# Altium PCB HV_DCDC_V2.PcbDoc (part 1 of 2)
Units mil, origin at the board's own origin, x right, y up, seen from the top; angles counter-clockwise.
Board outline 7131.02 x 4169.41 mil, 2 copper layers (Top Layer, Bottom Layer); 124 components, 83 nets, 337 pads, 14 vias.
Unrouted connection lines stored in the file: 231.
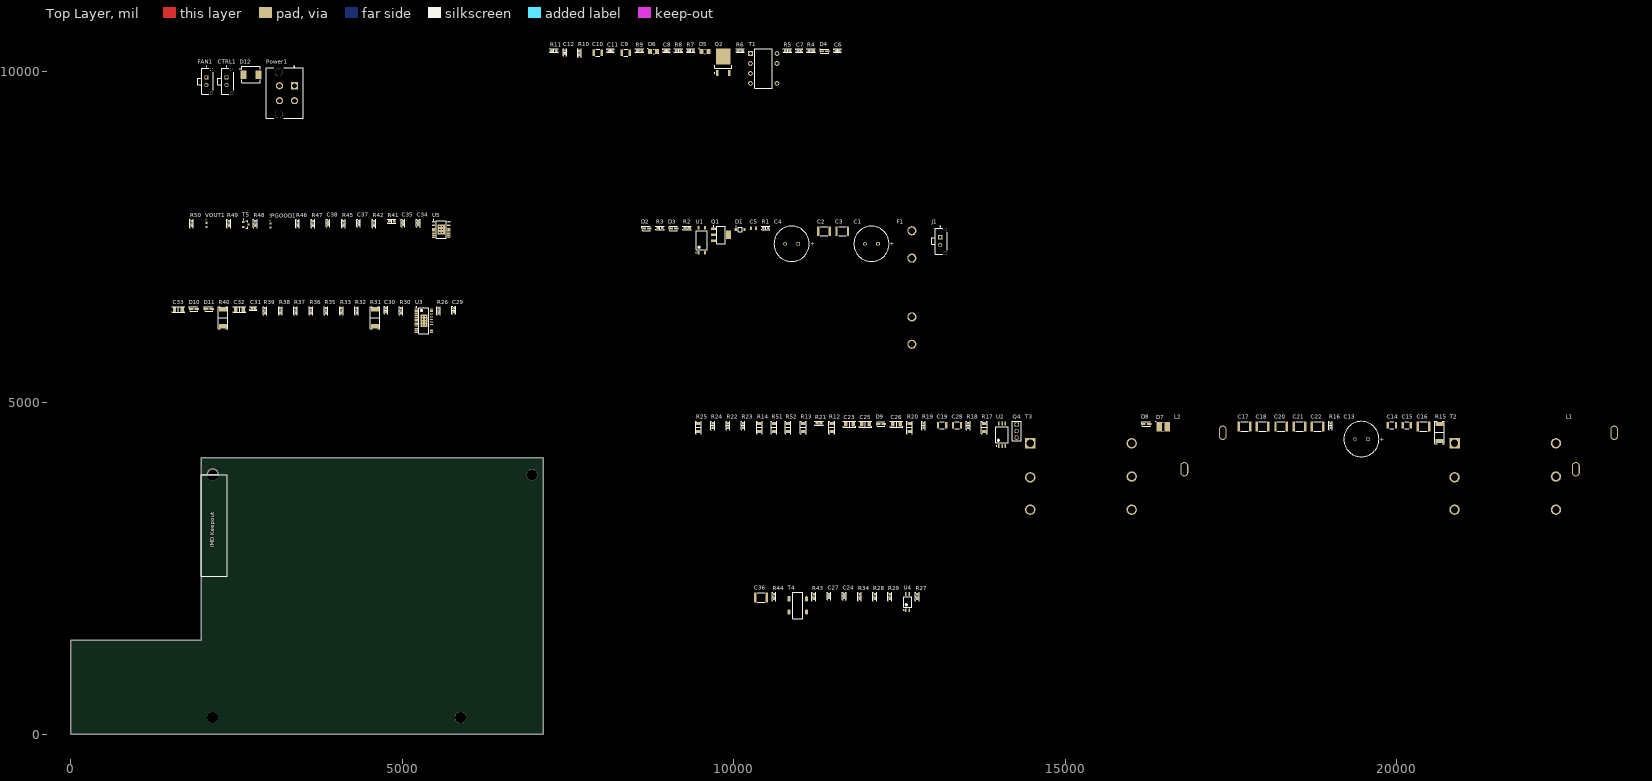
[diagram p0: Top Layer view]
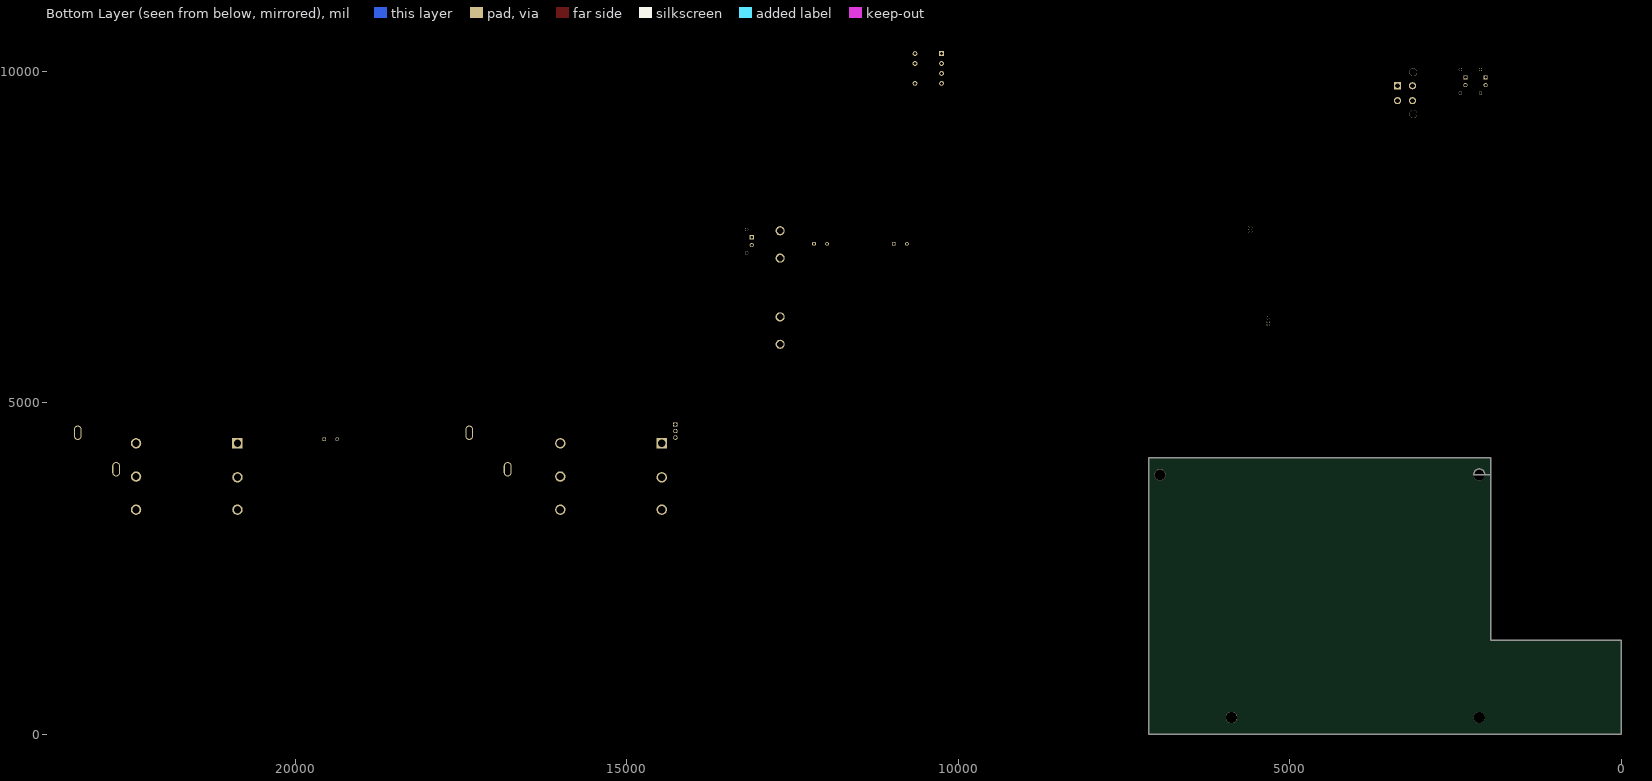
[diagram p1: Bottom Layer view, seen from below]

## Layer stack, top to bottom
Top Solder: solder mask 0.4, Solder Resist, Dk 3.5
Top Layer: signal copper 1.4
Dielectric 1: dielectric 12.6, FR-4, Dk 4.8
Bottom Layer: signal copper 1.4
Bottom Solder: solder mask 0.4, Solder Resist, Dk 3.5

## Board outline
0,0 7131.02,0 7131.02,4169.41 1968.5,4169.41 1968.5,3913.5 2060.13,3913.5 2061.71,3931.33 2067,3948.42 2075.76,3964.02 2087.61,3977.43 2102.01,3988.05 2118.32,3995.41 2135.82,3999.17 2153.71,3999.17 2171.21,3995.41 2187.52,3988.05 2201.92,3977.43 2213.77,3964.02 2222.53,3948.42 2227.82,3931.33 2227.82,3913.5 1968.5,3913.5 1968.5,1413.5 0,1413.5

## Design rules (kind name [scope] priority, off if disabled: settings)
Clearance [All] p1: gap=10 ignorepadtopadclearanceinfootprint=FALSE except(0: Arc-Hole Track-Hole SMDPad-Hole THPad-Hole Via-Hole Fill-Hole Poly-Hole Region-Hole Text-Hole)
PolygonConnect [All] p1: connectstyle=Relief reliefconductorwidth=10 reliefentries=4 polygonreliefangle="90 Angle" airgapwidth=10
RoomDefinition In [InComponentClass('In')] p1: confinementstyle=ConfineIn formatcopy=TRUE lockcomponents=FALSE outline 8590.24,5800 13240.24,5800 13240.24,7775 8590.24,7775
RoomDefinition V_AUX [InComponentClass('V_AUX')] p2: confinementstyle=ConfineIn formatcopy=TRUE lockcomponents=FALSE outline 7215,9730 11640,9730 11640,10450 7215,10450
RoomDefinition Trafo [InComponentClass('Trafo')] p3: confinementstyle=ConfineIn formatcopy=TRUE lockcomponents=FALSE outline 9415,3030 23455,3030 23455,4830 9415,4830
RoomDefinition Sek_CTRL [InComponentClass('Sek_CTRL')] p4: confinementstyle=ConfineIn formatcopy=TRUE lockcomponents=FALSE outline 1785,7471.57 5740,7471.57 5740,7876.57 1785,7876.57
RoomDefinition Prim_CTRL [InComponentClass('Prim_CTRL')] p5: confinementstyle=ConfineIn formatcopy=TRUE lockcomponents=FALSE outline 1520,6030.43 5935,6030.43 5935,6560.43 1520,6560.43
RoomDefinition Out [InComponentClass('Out')] p6: confinementstyle=ConfineIn formatcopy=TRUE lockcomponents=FALSE outline 1900.43,9272.17 3525.43,9272.17 3525.43,10187.17 1900.43,10187.17
RoomDefinition Interface_CTRL [InComponentClass('Interface_CTRL')] p7: confinementstyle=ConfineIn formatcopy=TRUE lockcomponents=FALSE outline 10295,1730.43 12925,1730.43 12925,2250.43 10295,2250.43
RoutingVias [All] p1: holewidth=28 width=50 viastyle="Through Hole" minholewidth=28 minwidth=50 maxholewidth=28 maxwidth=50
SolderMaskExpansion [All] p1: expansion=4 istentingtop=FALSE
Width [All] p1: maxlimit=10 minlimit=10 preferedwidth=10
30 further rules are at their usual default settings.

## Classes and differential pairs
component class V_AUX: C6 C7 C8 C9 C10 C11 C12 D4 D5 D6 Q2 R4 R5 R6 R7 R8 R9 R10 R11 T1
component class Trafo: C13 C14 C15 C16 C17 C18 C19 C20 C21 C22 C23 C25 C26 C28 D7 D8 D9 L1 L2 Q4 R12 R13 R14 R15 R16 R17 R18 R19 R20 R21 R22 R23 R24 R25 R51 R52 T2 T3 U2
component class Sek_CTRL: !PGOOD1 C34 C35 C37 C38 R41 R42 R45 R46 R47 R48 R49 R50 T5 U5 VOUT1
component class Prim_CTRL: C29 C30 C31 C32 C33 D10 D11 R26 R30 R31 R32 R33 R35 R36 R37 R38 R39 R40 U3
component class Out: CTRL1 D12 FAN1 Power1
component class In: C1 C2 C3 C4 C5 D1 D2 D3 F1 J1 Q1 R1 R2 R3 U1
component class Interface_CTRL: C24 C27 C36 R27 R28 R29 R34 R43 R44 T4 U4

## Components (designator, comment, footprint, x,y, rotation, side; value= is the part's Value field where it differs from the comment)
!PGOOD1 "Red, 2V" WL-SMCW_0603_H=0.7mm 3015,7671.57 r90 top
C1 "6.8uF" WCAP-AT1H_D13H20 12080.24,7395 r0 top
C2 "" WCAP-CSMH_1812_H2 11365.24,7585 r0 top
C3 "" WCAP-CSMH_1812_H2 11640.24,7585 r0 top
C4 "6.8uF" WCAP-AT1H_D13H20 10875.24,7395 r0 top
C5 "" WCAP-CSMH_0805_H1.25 10300.24,7630 r0 top
C6 "SMD Capacitor" "CAP 0603/1608" 11570,10310 r0 top value="OPT, 800V"
C7 "SMD Capacitor" "CAP 0603/1608" 10990,10310 r0 top value="150p, Opt"
C8 "SMD Capacitor" "CAP 0603/1608" 8990,10310 r0 top value=4.7uF
C9 "22nF, 1000V" WCAP-CSMH_1210_H1.6 8375,10280 r0 top
C10 "22nF, 1000V" WCAP-CSMH_1210_H1.6 7950,10280 r0 top
C11 "SMD Capacitor" "CAP 0603/1608" 8145,10310 r0 top value=22uF
C12 "SMD Capacitor" "CAP 0603/1608" 7455,10285 r90 top value=OPT
C13 "" WCAP-ATG8_D13H25 19470,4450 r0 top
C14 "" WCAP-CSGP_1210_H=2.5mm 19930,4660 r0 top
C15 "" WCAP-CSGP_1210_H=2.5mm 20155,4660 r0 top
C16 "4.7nF, 2000V" WCAP-CSMH_1812_H2 20405,4640 r0 top
C17 "4.7nF, 2000V" WCAP-CSMH_1812_H2 17705,4640 r0 top
C18 "4.7nF, 2000V" WCAP-CSMH_1812_H2 17980,4640 r0 top
C19 "" WCAP-CSGP_1210_H=2.5mm 13145,4660 r0 top
C20 "4.7nF, 2000V" WCAP-CSMH_1812_H2 18260,4640 r0 top
C21 "4.7nF, 2000V" WCAP-CSMH_1812_H2 18535,4640 r0 top
C22 "4.7nF, 2000V" WCAP-CSMH_1812_H2 18810,4640 r0 top
C23 "SMD Capacitor" "CAP 1206/3216" 11750,4675 r0 top value=220nF
C24 "SMD Capacitor" "CAP 0603/1608" 11670,2085.43 r90 top value=1uF
C25 "SMD Capacitor" "CAP 1206/3216" 11990,4675 r0 top value=OPT
C26 "SMD Capacitor" "CAP 1206/3216" 12460,4675 r0 top value=470pF
C27 "SMD Capacitor" "CAP 0603/1608" 11440,2085.43 r90 top value=220p
C28 "" WCAP-CSGP_1210_H=2.5mm 13370,4660 r0 top
C29 "SMD Capacitor" "CAP 0603/1608" 5780,6395.43 r90 top value=3.3nF
C30 "SMD Capacitor" "CAP 0603/1608" 4755,6395.43 r90 top value=470nF
C31 "SMD Capacitor" "CAP 0603/1608" 2755,6420.43 r0 top value=220nF
C32 "SMD Capacitor" "CAP 1206/3216" 2550,6405.43 r0 top value=4.7uF
C33 "SMD Capacitor" "CAP 1206/3216" 1625,6405.43 r0 top value=10uF
C34 "SMD Capacitor" "CAP 0603/1608" 5245,7711.57 r90 top value=4.7uF
C35 "SMD Capacitor" "CAP 0603/1608" 5015,7711.57 r90 top value=1uF
C36 "2.2nF, 3000V" WCAP-CSMH_1812_H2.5 10415,2060.43 r0 top
C37 "SMD Capacitor" "CAP 0603/1608" 4345,7711.57 r90 top value=22nF
C38 "SMD Capacitor" "CAP 0603/1608" 3885,7711.57 r90 top value=68pF
CTRL1 "43650-0229" FP-43650-0229-MFG 2340.43,9847.17 r90 top
D1 "MMSZ4707T1G" ONSC-SOD-123-2-425-04_V 10100.24,7610 r0 top
D2 "BAT46WH" DIOM2715X18N 8685.24,7625 r0 top
D3 "BAT46WH" DIOM2715X18N 9095.24,7625 r0 top
D4 "OPT" DIOM2715X18N 11375,10300 r0 top
D5 "SS10200HE_R1_00001" Chip2PinSM127P600-8N 9570,10295 r0 top
D6 "SS10200HE_R1_00001" Chip2PinSM127P600-8N 8795,10295 r0 top
D7 "CMR1U-10TR13" "DIOC4536X24L CMR1U-10" 16480,4635 r0 top
D8 "OPT" DIOM2715X18N 16225,4680 r0 top
D9 "OPT" DIOM2715X18N 12225,4680 r0 top
D10 "BAT46WH" DIOM2715X18N 1860,6410.43 r0 top
D11 "BAT46WH" DIOM2715X18N 2085,6410.43 r0 top
D12 "SMC30J24A" "JEDEC DO-214AB" 2720.43,9947.17 r0 top
F1 "10x38 Fuse Holder" "10x38 Fuse" 12690.24,5880 r90 top
FAN1 "43650-0229" FP-43650-0229-MFG 2035.43,9847.17 r90 top
J1 "43650-0229" FP-43650-0229-MFG 13105.24,7435 r90 top
L1 "AGM2222-562ME" AGM2222-562 22705,3995 r0 top
L2 "AGM2222-562ME" AGM2222-562 16800,3995 r0 top
Power1 "1720650004" FP-1720650004-MFG 3230.43,9667.17 r90 top
Q1 "IPN70R450P7SATMA1" SOT230P700X180-4L 9810.24,7530 r0 top
Q2 "STD2NK100Z / FQD2N100TM" "DPAK TO-252" 9845,10135 r90 top
Q4 "STF7N105K5" TO-220-3 14270,4670 r0 top
R1 "SMD Resistor" "STACKPOLE CSR0603" 10485.24,7635 r0 top value=100k
R2 "SMD Resistor" "STACKPOLE CSR0603" 9300.24,7635 r0 top value=745
R3 "CHV2512-FX-1004ELF" "STACKPOLE CSR0603" 8890.24,7635 r0 top value="1M, 3kV, 1W"
R4 "SMD Resistor" "STACKPOLE CSR0603" 11170,10310 r0 top value=OPT
R5 "SMD Resistor" "STACKPOLE CSR0603" 10815,10310 r0 top value=499
R6 "KDV12FR200ET" "STACKPOLE CSR0603" 10100,10310 r0 top value=200m
R7 "SMD Resistor" "STACKPOLE CSR0603" 9355,10310 r0 top value=10
R8 "SMD Resistor" "STACKPOLE CSR0603" 9170,10310 r0 top value=2
R9 "SMD Resistor" "STACKPOLE CSR0603" 8580,10310 r0 top value=10
R10 "SMD Resistor" "STACKPOLE CSR0603" 7675,10275 r90 top value=10k
R11 "SMD Resistor" "STACKPOLE CSR0603" 7290,10310 r0 top value=806
R12 "SMD Resistor" "STACKPOLE CSR1206" 11480,4625 r90 top value=1k
R13 "" "STACKPOLE CSR1206" 11050,4625 r90 top value=5.5m
R14 "SMD Resistor" "STACKPOLE CSR1206" 10390,4625 r90 top value=1k
R15 "CRCW25122K20FKEG" "STACKPOLE CSRN2512" 20650,4550 r90 top value="2.3k, 500V, 1W"
R16 "SMD Resistor" "STACKPOLE CSR0603" 19005,4655 r90 top value=4.42
R17 "SMD Resistor" "STACKPOLE CSR1206" 13780,4625 r90 top value=232
R18 "SMD Resistor" "STACKPOLE CSR0603" 13540,4655 r90 top value=3.3
R19 "SMD Resistor" "STACKPOLE CSR0603" 12865,4655 r90 top value=10k
R20 "SMD Resistor" "STACKPOLE CSR1206" 12655,4625 r90 top value=154
R21 "SMD Resistor" "STACKPOLE CSR0603" 11290,4690 r0 top value=0
R22 "SMD Resistor" "STACKPOLE CSR0603" 9915,4655 r90 top value=20k
R23 "SMD Resistor" "STACKPOLE CSR0603" 10145,4655 r90 top value=12.7k
R24 "SMD Resistor" "STACKPOLE CSR0603" 9685,4655 r90 top value=1.5k
R25 "ULR1S-R0055FT2" "STACKPOLE CSR1206" 9470,4625 r90 top value=5m
R26 "SMD Resistor" "STACKPOLE CSR0603" 5550,6385.43 r90 top value=28k
R27 "SMD Resistor" "STACKPOLE CSR0603" 12770,2075.43 r90 top value=1k
R28 "SMD Resistor" "STACKPOLE CSR0603" 12130,2075.43 r90 top value=100k
R29 "SMD Resistor" "STACKPOLE CSR0603" 12355,2075.43 r90 top value=100k
R30 "SMD Resistor" "STACKPOLE CSR0603" 4985,6385.43 r90 top value=78.7k
R31 "CHV2512-FX-1004ELF" "STACKPOLE CSRN2512" 4590,6280.43 r90 top value="1M, 3kV, 1W"
R32 "SMD Resistor" "STACKPOLE CSR0603" 4315,6385.43 r90 top value=148k
R33 "SMD Resistor" "STACKPOLE CSR0603" 4085,6385.43 r90 top value=3.47k
R34 "SMD Resistor" "STACKPOLE CSR0603" 11900,2075.43 r90 top value=100
R35 "SMD Resistor" "STACKPOLE CSR0603" 3855,6385.43 r90 top value=124k
R36 "SMD Resistor" "STACKPOLE CSR0603" 3625,6385.43 r90 top value=1.995k
R37 "SMD Resistor" "STACKPOLE CSR0603" 3395,6385.43 r90 top value=40.2k
R38 "SMD Resistor" "STACKPOLE CSR0603" 3165,6385.43 r90 top value=75k
R39 "SMD Resistor" "STACKPOLE CSR0603" 2935,6385.43 r90 top value=10k
R40 "RCV2512750KFKEGAT" "STACKPOLE CSRN2512" 2300,6280.43 r90 top value="750k, 3kV, 1W"
R41 "SMD Resistor" "STACKPOLE CSR0603" 4845,7736.57 r0 top value=3.16k
R42 "SMD Resistor" "STACKPOLE CSR0603" 4575,7701.57 r90 top value=530k
R43 "SMD Resistor" "STACKPOLE CSR0603" 11210,2075.43 r90 top value=309
R44 "SMD Resistor" "STACKPOLE CSR0603" 10610,2075.43 r90 top value=200
R45 "SMD Resistor" "STACKPOLE CSR0603" 4115,7701.57 r90 top value=5.62k
R46 "SMD Resistor" "STACKPOLE CSR0603" 3425,7701.57 r90 top value=540
R47 "SMD Resistor" "STACKPOLE CSR0603" 3655,7701.57 r90 top value=10k
R48 "SMD Resistor" "STACKPOLE CSR0603" 2785,7701.57 r90 top value=500
R49 "SMD Resistor" "STACKPOLE CSR0603" 2385,7701.57 r90 top value=100k
R50 "SMD Resistor" "STACKPOLE CSR0603" 1825,7701.57 r90 top value=1.04k
R51 "" "STACKPOLE CSR1206" 10610,4625 r90 top value=5.5m
R52 "" "STACKPOLE CSR1206" 10820,4625 r90 top value=5.5m
T1 "750817020" "750817020 Transformer" 10255,10265 r0 top
T2 "R41-AC-2202" "R41-AC-2202 Landing Pattern" 20875,4385 r0 top
T3 "R41-AC-2202" "R41-AC-2202 Landing Pattern" 14475,4385 r0 top
T4 "PE-68386NLT" "PE-68386NL Landing Pattern" 10835,2040.43 r0 top
T5 "BC848BLT1G" ONSC-SOT-23-3-318-08_V 2645,7686.57 r0 top
U1 "TCLT1000" VISH-SOP4L-4_V 9520.24,7450 r90 top
U2 "ACPL-P346-000E" "SOP-6 Stretched" 14050,4515 r90 top
U3 "LT3752EFE-1#PBF" TSSOP127P600-8N 5330,6235.43 r0 top
U4 "PS2801C-1-V-F3-A" SSOP127P700X200-4L 12625,1990.43 r90 top
U5 "LT8311EFE#PBF" "TSSOP 20 Lead LT8311" 5590,7611.57 r0 top
VOUT1 "Green, 3.2V" WL-SMCW_0603_H=0.7mm 2050,7681.57 r90 top

## Footprints (in the part's own frame and the unit in brackets; to place one, negate y for a bottom-side part, rotate by r counter-clockwise, add the part's x,y. Pads: shape width x height; smd on the part's side, far side on the other; paste and mask are expansions set on the pad)
"10x38 Fuse" [mm]
  round 3.5 hole 2.5: 1(0,0) 1(10.49,0) 2(33,0) 2(43.49,0)
  body extent -0.74,-6 43.75,6, height 19
"750817020 Transformer" [mm]
  rect 1.8x1.8 hole 1.2: 1(0,0)
  round 1.8 hole 1.2: 2(0,-3.81) 3(0,-7.62) 4(0,-11.43) 5(10.16,-11.43) 7(10.16,-3.81) 8(10.16,0)
  silkscreen extent 1.73,-13.33 8.43,1.91
AGM2222-562 [mm]
  oval 3x5.5 hole 2 slot 4.5 at 90 deg: 1(0,0) 2(14.7,14)
  body extent -4.2,-4.5 18.8,18.5, height 23
"CAP 0603/1608" [mm] "Chip Capacitor, 2-Leads, Body 1.60x0.80mm, IPC Medium Density"
  rect 0.9x1 smd: 1(-0.675,0) 2(0.675,0)
  silkscreen extent -1.4,-0.7 1.4,0.7, body extent -0.8,-0.41 0.8,0.41, height 0.82
"CAP 1206/3216" [mm] "Chip Capacitor, 2-Leads, Body 3.25x1.60mm, IPC Medium Density"
  rect 1.3x1.8 smd: 1(-1.45,0) 2(1.45,0)
  silkscreen extent -2.37,-1.12 2.37,1.12, body extent -1.6,-0.81 1.6,0.81, height 1.62
Chip2PinSM127P600-8N [mm] "SS10200HE landing Pattern"
  rect 1.55x1.85 smd: 1(-1.325,0) 2(1.325,0)
  silkscreen extent -2.36,-0.82 0.15,1.19, body extent -1.95,-0.95 1.95,0.95, height 1
"DIOC4536X24L CMR1U-10" [mm] "Chip Diode, 2-Leads, Body 4,46x3,56mm, IPC High Density"
  rect 2.1x3.75 smd: 1(-1.55,0) 2(1.55,0)
  silkscreen extent -2.86,-1.78 0.1,2.14, body extent -2.42,-1.91 2.43,1.91, height 2.44
DIOM2715X18N [mm] "Molded Diode, 2-Leads, Body 2,70x1,55mm, IPC Medium Density"
  rect 1.75x0.7 smd: 1(-1.075,0) 2(1.075,0)
  silkscreen extent -1.9,-0.85 1.45,0.85, body extent -1.65,-0.85 1.65,0.85, height 1.8
"DPAK TO-252" [mm] "DPAK High density"
  rect 2.3x0.95 smd: 1(-4.1,2.29) 2(-4.1,-2.29)
  rect 6x5.45 smd: 3(2.2,0)
  silkscreen extent -4.22,-3.3 -1.2,3.44, body extent -2.35,-3.3 3.85,3.3, height 2.4
FP-43650-0229-MFG [mm]
  rect 1.57x1.57 hole 1.02 paste-1000 mask+0: 1(1.5,-0.315)
  round 1.57 hole 1.02 paste-1000 mask+0: 2(-1.5,-0.315)
  round 1.27 hole 1.27 unplated paste-1000 mask+0: ""(-4.5,-2.275) ""(4.5,-2.275)
  silkscreen extent -4.95,-3.04 5.75,3.04, body extent -5.24,-3.14 5.24,3.14, height 0.25
FP-1720650004-MFG [mm]
  rect 2.75x2.75 hole 1.8 paste-1000 mask+0: 1(2.85,-3.705)
  round 2.75 hole 1.8 paste-1000 mask+0: 2(-2.85,-3.705) 3(2.85,1.995) 4(-2.85,1.995)
  round 3 hole 3 unplated paste-1000 mask+0: ""(-8.02,2.32) ""(8.02,2.32)
  silkscreen extent -9.67,-7.14 10.39,7.14, body extent -9.77,-7.24 9.77,7.24, height 0.25
"JEDEC DO-214AB" [mm] "Molded Diode, 2-Leads, Body 6,88x5,90mm, IPC Medium Density"
  rect 2.4x3.15 smd: 1(-2.85,0) 2(2.85,0)
  silkscreen extent -4.37,-3.15 3.6,3.15, body extent -3.57,-3.13 3.58,3.13, height 2.45
ONSC-SOD-123-2-425-04_V [mm] "SOD, 2-Leads, Body 2.69x1.6mm"
  rect 0.91x1.22 smd: 1(-1.635,0) 2(1.635,0)
  silkscreen extent -1.76,-0.8 0.78,1.28, body extent -1.35,-0.8 1.35,0.8, height 1.35
ONSC-SOT-23-3-318-08_V [mm] "SOT23, 3-Leads, Body 2.92x1.3mm, Pitch 0.95mm"
  rect 0.9x0.8 smd: 1(-1,0.95) 2(-1,-0.95) 3(1,0)
  silkscreen extent -1.12,-1.46 0.65,2.02, body extent -0.65,-1.46 0.65,1.46, height 1.11
"PE-68386NL Landing Pattern" [mil]
  rect 45x80 smd: 1(0,0)
  oval 45x80 smd: 3(0,-200) 4(265,-200) 6(265,0)
  silkscreen extent 58,-300 208,100
"R41-AC-2202 Landing Pattern" [mm]
  round 4 hole 2.8: 0(0,-13) 5(0,-25.4) 6(38.85,-25.4) 7(38.85,-12.7) 8(38.85,0)
  rect 4x4 hole 2.8: 1(0,0)
  body extent -2.15,-33.8 40.75,8.4, height 15.2
"SOP-6 Stretched" [mm] "ACPL-P346"
  oval 1.65x0.55 smd: 1(-4.325,1.27) 2(-4.325,0) 3(-4.325,-1.27) 4(4.325,-1.27) 5(4.325,0) 6(4.325,1.27)
  silkscreen extent -4.45,-2.4 3.1,2.4, body extent -3.5,-2.4 3.5,2.4, height 3.3
SOT230P700X180-4L [mm] "SOT223, 4-Leads, Body 6,50x7,00mm (avg), Pitch 2,30mm, IPC High Density"
  rect 1.95x0.9 smd: 1(-2.825,2.3) 2(-2.825,0) 3(-2.825,-2.3)
  rect 1.95x3.25 smd: 4(2.825,0)
  silkscreen extent -2.95,-3.35 1.55,3.42, body extent -1.85,-3.35 1.85,3.35, height 1.8
SSOP127P700X200-4L [mm] "SSOP, 4-Leads, Body 2,70x4,40mm, Pitch 1,27mm, IPC High Density"
  rect 1.4x0.55 smd: 1(-3.1,0.635) 2(-3.1,-0.635) 3(3.1,-0.635) 4(3.1,0.635)
  silkscreen extent -3.22,-1.5 2,1.58, body extent -2.2,-1.5 2.2,1.5, height 2
"STACKPOLE CSR0603" [mm] "Chip Resistor, 2-Leads, Body 1.60x0.80mm, IPC Medium Density"
  rect 1x0.9 smd: 1(-0.9,0) 2(0.9,0)
  silkscreen extent -1.6,-0.7 1.6,0.7, body extent -0.85,-0.4 0.85,0.4, height 0.45
"STACKPOLE CSR1206" [mm] "Chip Resistor, 2-Leads, Body 3.13x1.55mm, IPC Medium Density"
  rect 1.15x1.7 smd: 1(-1.575,0) 2(1.575,0)
  silkscreen extent -2.4,-1.1 2.4,1.1, body extent -1.6,-0.78 1.6,0.77, height 0.55
"STACKPOLE CSRN2512" [mm] "Chip Resistor, 2-Leads, Body 6.40x3.20mm, IPC Medium Density"
  rect 1.6x3.1 smd: 1(-3.25,0) 2(3.25,0)
  silkscreen extent -4.3,-1.8 4.3,1.8, body extent -3.25,-1.58 3.25,1.57, height 0.6
TO-220-3 [mm]
  rect 1.7x1.7 hole 1.3: 1(0,0)
  round 1.7 hole 1.3: 2(0,-2.5) 3(0,-5)
  silkscreen extent -1.68,-6.25 1.68,1.25
TSSOP127P600-8N [mm] "TSSOP 38 Lead LT 3752-1 w. missing Leads for Spacing"
  rect 1.25x0.35 smd: 1(-2.925,4.5) 2(-2.925,4) 3(-2.925,3.5) 4(-2.925,3) 5(-2.925,2.5) 6(-2.925,2) 7(-2.925,1.5) 8(-2.925,1) 9(-2.925,0.5) 10(-2.925,0) 11(-2.925,-0.5) 12(-2.925,-1) 13(-2.925,-1.5) 14(-2.925,-2) 15(-2.925,-2.5) 16(-2.925,-3) 17(-2.925,-3.5) 18(-2.925,-4) 19(-2.925,-4.5) 20(2.925,-4.5) 21(2.925,-4) 22(2.925,-3.5) 24(2.925,-2.5) 26(2.925,-1.5) 28(2.925,-0.5) 30(2.925,0.5) 32(2.925,1.5) 34(2.925,2.5) 36(2.925,3.5) 37(2.925,4) 38(2.925,4.5)
  rect 2.74x4.75 smd: 39(0,0)
  silkscreen extent -3.05,-4.9 1.9,5.35, body extent -2.25,-4.9 2.25,4.9, height 1.2
"TSSOP 20 Lead LT8311" [mm] "TSSOP 20 Lead LT8311 with missing pins for clearance"
  oval 1.3x0.5 smd: 1(-2.9,2.925) 3(-2.9,1.625) 5(-2.9,0.325) 6(-2.9,-0.325) 7(-2.9,-0.975) 8(-2.9,-1.625) 9(-2.9,-2.275) 10(-2.9,-2.925) 11(2.9,-2.925) 12(2.9,-2.275) 13(2.9,-1.625) 14(2.9,-0.975) 15(2.9,-0.325) 16(2.9,0.325) 18(2.9,1.625) 20(2.9,2.925)
  rect 2.74x3.86 smd: 21(0,0)
  silkscreen extent -3.02,-3.3 1.85,3.85, body extent -2.25,-3.3 2.25,3.3, height 1.2
VISH-SOP4L-4_V [mm] "SOP, 4-Leads, Body 4.1x7.7mm, Pitch 2.54mm"
  rect 1.3x0.9 smd: 1(-4.75,1.27) 2(-4.75,-1.27) 3(4.75,-1.27) 4(4.75,1.27)
  silkscreen extent -4.87,-2.05 3.7,2.39, body extent -5.07,-2.05 5.07,2.05, height 2.3
WCAP-AT1H_D13H20 [mm] "Aluminium Electrolytic Radial THD Capacitors, 13x20mm"
  rrect50% 1.4x1.4 hole 0.9: 1(2.5,0)
  round 1.4 hole 0.9: 2(-2.5,0)
  silkscreen extent -6.75,-6.75 6.75,6.75, body extent -6.49,-6.5 6.5,6.5, height 20.26
WCAP-ATG8_D13H25 [mm] "Aluminum Electrolytic Capacitors, 13x25mm"
  rrect50% 1.4x1.4 hole 0.9: 1(2.5,0)
  round 1.4 hole 0.9: 2(-2.5,0)
  silkscreen extent -6.75,-6.75 6.75,6.75, body extent -6.49,-6.5 6.5,6.5, height 25.31
WCAP-CSGP_1210_H=2.5mm [mm] "Ceramic Capacitors, body 3.2x2.5mm"
  rect 0.9x2.5 smd: 1(-1.55,0) 2(1.55,0)
  silkscreen extent -0.8,-1.4 0.8,1.4, body extent -1.6,-1.25 1.6,1.25, height 2.5
WCAP-CSMH_0805_H1.25 [mm] "Ceramic Capacitors, body 2x1.25mm"
  rect 0.9x1.3 smd: 1(-0.95,0) 2(0.95,0)
  body extent -1,-0.62 1,0.63, height 1.25
WCAP-CSMH_1210_H1.6 [mm] "Ceramic Capacitors, body 3.2x2.5mm"
  rect 0.9x2.5 smd: 1(-1.55,0) 2(1.55,0)
  silkscreen extent -0.8,-1.35 0.8,1.35, body extent -1.6,-1.25 1.6,1.25, height 1.6
WCAP-CSMH_1812_H2 [mm] "Ceramic Capacitors, body 4.5x3.2mm"
  rect 0.9x3.8 smd: 1(-2.2,0) 2(2.2,0)
  silkscreen extent -1.45,-1.75 1.45,1.75, body extent -2.25,-1.6 2.25,1.6, height 2
WCAP-CSMH_1812_H2.5 [mm] "Ceramic Capacitors, body 4.5x3.2mm"
  rect 0.9x3.8 smd: 1(-2.2,0) 2(2.2,0)
  silkscreen extent -1.45,-1.75 1.45,1.75, body extent -2.25,-1.6 2.25,1.6, height 2.5
WL-SMCW_0603_H=0.7mm [mm] "SMD Mono-color Chip LED, body 1.6x0.8mm"
  rect 0.8x0.8 smd: 1(-0.8,0) 2(0.8,0)
  body extent -0.8,-0.4 0.8,0.4, height 0.7

## Part data
!PGOOD1: library part 150060RS75000, "WL-SMCW SMT Mono-color Chip LED Waterclear, size 0603, Red, 2V, 140deg", Emitting Color=Red, Forward Voltage typ.=2V, Operating Temperature="-40 to +85degC", Chip Technology=AlInGaP, ComponentLink1Description=Manufacturer, ComponentLink1URL=http://www.we-online.de, ComponentLink2Description=Datasheet, ComponentLink2URL=https://www.we-online.com/catalog/datasheet/150060RS75000.pdf, Dominant Wavelength typ.=625nm, Luminous Intensity typ.=250mcd, Mounting Technology=SMT, Packaging="Tape and Reel", Part Number=150060RS75000, Peak Wavelength typ.=630nm, Published Date="December 2019", Publisher="Wurth Elektronik", Size=0603, Viewing Angle=140deg
C1 C4: library part 860241478002, "WCAP-AT1H Aluminum Electrolytic Capacitor, Radial, THT, D13xH20mm, 6.8uF, 450V", Capacitance Tolerance=+/-20%, Leakage Current=222.4uA, Manufacturer="Wurth Elektronik", Operating Temperature="-25 to +105degC", Rated Voltage=450VDC, Ripple Current=240mA, Voltage=450V, Capacitance=6.8uF, ComponentLink1Description=Manufacturer, ComponentLink1URL=http://www.we-online.de, ComponentLink2Description=Datasheet, ComponentLink2URL=https://www.we-online.com/catalog/datasheet/860241478002.pdf, Diameter=13mm, Dissipation Factor=20%, Endurance=10000h, Height=20mm, Manufacturer Part Number=860241478002, Mounting Technology=THT, Packaging="Ammo Pack", Published Date="October 2020", Technical Reference=ATJI2006R8M450DSPACK000
C2 C3: library part 885342211006, "WCAP-CSMH Multilayer Ceramic Chip Capacitor, size 1812, X7R Class II, 100nF, 630V", Capacitance=100nF, Capacitance Tolerance=+/-10%, Insulation Resistance=1GOhm, Manufacturer="Wurth Elektronik", Operating Temperature="-55 to +125degC", Rated Voltage=630VDC, Voltage=630V, Ceramic Type="X7R Class II", ComponentLink1Description=Manufacturer, ComponentLink1URL=http://www.we-online.de, ComponentLink2Description=Datasheet, ComponentLink2URL=https://www.we-online.com/catalog/datasheet/885342211006.pdf, Dissipation Factor=2.5%, Height=2mm, Manufacturer Part Number=885342211006, Mounting Technology=SMT, Packaging="Tape and Reel", Published Date="May 2020", Size=1812, Technical Reference=X7R1812104K630DFCT10000
C5: library part 885342207016, "WCAP-CSMH Multilayer Ceramic Chip Capacitor, size 0805, X7R Class II, 2.2nF, 1000V", Capacitance=2.2nF, Capacitance Tolerance=+/-10%, Insulation Resistance=10GOhm, Manufacturer="Wurth Elektronik", Operating Temperature="-55 to +125degC", Rated Voltage=1000VDC, Voltage=1000V, Ceramic Type="X7R Class II", ComponentLink1Description=Manufacturer, ComponentLink1URL=http://www.we-online.de, ComponentLink2Description=Datasheet, ComponentLink2URL=https://www.we-online.com/catalog/datasheet/885342207016.pdf, Dissipation Factor=2.5%, Height=1.25mm, Manufacturer Part Number=885342207016, Mounting Technology=SMT, Packaging="Tape and Reel", Published Date="May 2020", Size=0805, Technical Reference=X7R0805222KA00DFCT10000
C6 C7 C12 C25: "Capacitor with multiple Footprints"
C8 C11 C24 C27 C29 C30 C31 C32 C33 C34 C37: "Capacitor with multiple Footprints", Voltage=16V
C9 C10: library part 885342209007, "WCAP-CSMH Multilayer Ceramic Chip Capacitor, size 1210, X7R Class II, 22nF, 1000V", Capacitance=22nF, Capacitance Tolerance=+/-10%, Insulation Resistance=4.55GOhm, Manufacturer="Wurth Elektronik", Operating Temperature="-55 to +125degC", Rated Voltage=1000VDC, Ceramic Type="X7R Class II", ComponentLink1Description=Manufacturer, ComponentLink1URL=http://www.we-online.de, ComponentLink2Description=Datasheet, ComponentLink2URL=https://www.we-online.com/catalog/datasheet/885342209007.pdf, Dissipation Factor=2.5%, Height=1.6mm, Manufacturer Part Number=885342209007, Mounting Technology=SMT, Packaging="Tape and Reel", Published Date="May 2020", Size=1210, Technical Reference=X7R1210223KA00DFCT10000
C13: library part 860010478021, "WCAP-ATG8 Aluminum Electrolytic Capacitor, Radial, THT, D13xH25, 2200uF, 25V", Capacitance=2200uF, Capacitance Tolerance=+/-20%, Leakage Current=550uA, Manufacturer="Wurth Elektronik", Operating Temperature="-40 to +85degC", Rated Voltage=25VDC, Ripple Current=1705mA, Voltage=25V, ComponentLink1Description=Manufacturer, ComponentLink1URL=http://www.we-online.de, ComponentLink2Description=Datasheet, ComponentLink2URL=https://www.we-online.com/catalog/datasheet/860010478021.pdf, Diameter=13mm, Dissipation Factor=14%, Endurance=2000h, Height=25mm, Manufacturer Part Number=860010478021, Mounting Technology=THT, Packaging="Ammo Pack", Published Date="October 2020", Technical Reference=ATBI250222M025DSPACB000
C14 C15 C19 C28: library part 885012109014, "WCAP-CSGP Multilayer Ceramic Chip Capacitor, General Purpose, size 1210, X5R, 22uF, 25V", Capacitance=22uF, Capacitance Tolerance=+/-20%, Isolation Resistance  min.=0.005GOhm, Manufacturer="Wurth Elektronik", Operating Temperature="-55 to +85degC", Rated Voltage=25VDC, Voltage=25V, Ceramic Type=X5R, ComponentLink1Description=Manufacturer, ComponentLink1URL=http://www.we-online.de, ComponentLink2Description=Datasheet, ComponentLink2URL=https://www.we-online.com/catalog/datasheet/885012109014.pdf, Dissipation Factor max.=5%, Height=2.5mm, Manufacturer Part Number=885012109014, Mounting Technology=SMT, Packaging="Tape and Reel", Published Date="April 2021", Q-Factor min.=-, Size=1210, Technical Reference=X5R1210226M025DFCT10000
C16 C17: library part 885342211008, "WCAP-CSMH Multilayer Ceramic Chip Capacitor, size 1812, X7R Class II, 4.7nF, 2000V", Capacitance=4.7nF, Capacitance Tolerance=+/-10%, Insulation Resistance=10GOhm, Manufacturer="Wurth Elektronik", Operating Temperature="-55 to +125degC", Rated Voltage=2000VDC, Voltage=2000V, Ceramic Type="X7R Class II", ComponentLink1Description=Manufacturer, ComponentLink1URL=http://www.we-online.de, ComponentLink2Description=Datasheet, ComponentLink2URL=https://www.we-online.com/catalog/datasheet/885342211008.pdf, Dissipation Factor=2.5%, Height=2mm, Manufacturer Part Number=885342211008, Mounting Technology=SMT, Packaging="Tape and Reel", Published Date="May 2020", Size=1812, Technical Reference=X7R1812472KB00DFCT10000
C18 C20 C21 C22: library part 885342211008, "WCAP-CSMH Multilayer Ceramic Chip Capacitor, size 1812, X7R Class II, 4.7nF, 2000V", Capacitance=4.7nF, Capacitance Tolerance=+/-10%, Insulation Resistance=10GOhm, Manufacturer="Wurth Elektronik", Operating Temperature="-55 to +125degC", Rated Voltage=2000VDC, Ceramic Type="X7R Class II", ComponentLink1Description=Manufacturer, ComponentLink1URL=http://www.we-online.de, ComponentLink2Description=Datasheet, ComponentLink2URL=https://www.we-online.com/catalog/datasheet/885342211008.pdf, Dissipation Factor=2.5%, Height=2mm, Manufacturer Part Number=885342211008, Mounting Technology=SMT, Packaging="Tape and Reel", Published Date="May 2020", Size=1812, Technical Reference=X7R1812472KB00DFCT10000
C23 C26: "Capacitor with multiple Footprints", Voltage=50V
C35: "Capacitor with multiple Footprints", Voltage=6.3V
C36: library part 885342211010, "WCAP-CSMH Multilayer Ceramic Chip Capacitor, size 1812, X7R Class II, 2.2nF, 3000V", Capacitance=2.2nF, Capacitance Tolerance=+/-10%, Insulation Resistance=10GOhm, Manufacturer="Wurth Elektronik", Operating Temperature="-55 to +125degC", Rated Voltage=3000VDC, Ceramic Type="X7R Class II", ComponentLink1Description=Manufacturer, ComponentLink1URL=http://www.we-online.de, ComponentLink2Description=Datasheet, ComponentLink2URL=https://www.we-online.com/catalog/datasheet/885342211010.pdf, Dissipation Factor=2.5%, Height=2.5mm, Manufacturer Part Number=885342211010, Mounting Technology=SMT, Packaging="Tape and Reel", Published Date="May 2020", Size=1812, Technical Reference=X7R1812222KC00DFCT10000
C38: "Capacitor with multiple Footprints", Voltage=25V
CTRL1 FAN1 J1: library part CMP-04776-000041-1, "CONN HEADER VERT 2POS 3MM", Current Rating=8.5A, Manufacturer=Molex, Package=0, Temperature="-40°C to +105°C", Temperature Range High=+105°C, Temperature Range Low=-40°C, Voltage Rating=600V, Automotive=No, Category=Conn, ComponentLink2Description=Datasheet, ComponentLink2URL=https://www.molex.com/webdocs/datasheets/pdf/en-us/0436500229_PCB_HEADERS.pdf, Conn Gender=Male, Conn Orientation=Vertical, Contact Material=Gold,Nickel, Device Class L1=Connectors, Device Class L2="Headers and Wire Housings", Device Class L3=unset, Digikey Description="CONN HEADER VERT 2POS 3MM", Footprint Url=https://www.molex.com/pdm_docs/sd/436500229_sd.pdf, Height=10.15mm, Lead Free=Yes, Manufacturer Part Number=43650-0229, Mouser Description="Headers & Wire Housings MicroFit 3.0 SR V TH Peg 30Au 2Ckt", Number Of Contacts=2, Number Of Rows=1, Octopart=https://octopart.com/43650-0229-molex-7652326, Pitch=3mm, RoHS=TRUE
D1: library part CMP-1060-00328-1, "Zener Voltage Regulator, 500 mW, 2-Pin SOD-123, Pb-Free, Tape and Reel", Manufacturer="On Semiconductor", ComponentLink1Description="Manufacturer URL", ComponentLink1URL=http://www.onsemi.com/, ComponentLink2Description=Datasheet, ComponentLink2URL=http://www.onsemi.com/pub_link/Collateral/MMSZ4678T1-D.PDF, ComponentLink3Description="Package Specification", ComponentLink3URL=http://www.onsemi.com/pub_link/Collateral/425-04.PDF, DatasheetVersion="Rev. 9", Mounting Technology="Surface Mount", P Max (W)=0.5, PackageDescription="2-Pin SOD, Body 1.6 x 2.69 mm", PackageReference=SOD-123-2-425-04, PackageVersion="Rev. G, 10/2009", Packing="Tape and Reel", PartNumber=MMSZ4707T1G, RoHS=Pb-Free, VZ Typ (V)=20
D4 D8 D9: library part BAT46WH, Supplier 1=Mouser
D5 D6: "Schottky 1A 200V SOD-123HE", Manufacturer="Pan Jit", Manufacturer Part Number=SS10200HE_R1_00001, Pricing 1="1=0,40000, 10=0,30100, 100=0,17040, 500=0,11286, 1000=0,08653 (USD)", RoHS=Yes, Stock 1=9000, Supplier 1=DigiKey
D7: "Silicon Ultra Fast Recovery Rectifier 1000V 30A 2-Pin SMB Surface Mount T/R", Average Rectified Current=1A, Case/Package=SMB, Forward Voltage=1.7V, Manufacturer="Central Semiconductor", Max Repetitive Reverse Voltage (Vrrm)=1kV, Max Reverse Current=5uA, Category="Rectifier Diodes", ComponentLink1Description=http://www.mouser.com/ds/2/68/cmr1u-01-34700.pdf?src-supplier=Mouser, ComponentLink1URL=http://www.mouser.com/ds/2/68/cmr1u-01-34700.pdf?src-supplier=Mouser, ComponentLink2Description=https://www.centralsemi.com/get_document.php?cmp=1&mergetype=pd&mergepath=pd&pdf_id=CMR1U-01.PDF&src-supplier=Digi-Key, ComponentLink2URL=https://www.centralsemi.com/get_document.php?cmp=1&mergetype=pd&mergepath=pd&pdf_id=CMR1U-01.PDF&src-supplier=Digi-Key, ComponentLink3Description=http://www.centralsemi.com/pdf/CMR1U-01.PDF?src-supplier=Future+Electronics, ComponentLink3URL=http://www.centralsemi.com/pdf/CMR1U-01.PDF?src-supplier=Future+Electronics, ComponentLink4Description=https://my.centralsemi.com/get_document.php?cmp=1&amp;mergetype=pd&amp;mergepath=pd&amp;pdf_id=CMR1U-01.PDF&src-supplier=Digi-Key, ComponentLink4URL=https://my.centralsemi.com/get_document.php?cmp=1&amp;mergetype=pd&amp;mergepath=pd&amp;pdf_id=CMR1U-01.PDF&src-supplier=Digi-Key, Lead Free="Lead Free", Manufacturer Part Number=CMR1U-10TR13, Max Reverse Voltage (DC)=1kV, Mount="Surface Mount", Packaging="Tape and Reel", Pricing 1="1=1,16000, 10=1,03800, 100=0,80960, 500=0,66880, 1000=0,52800 (USD)", Reverse Recovery Time=100ns, RoHS=No, RoHS Compliant=No, Supplier 1=Digi-Key
D12: "3000 W TVS in SMC package", Breakdown Voltage=26.7V, Case/Package=SMC, Clamping Voltage=38.9V, Manufacturer=STMicroelectronics, Max Operating Temperature=175°C, Max Power Dissipation=3kW, Min Operating Temperature=-55°C, Package Quantity=2500, Peak Pulse Current=77A, Power Line Protection=No, Resistor Type=Zener, Reverse Standoff Voltage=24V, Supplier Part Number 1=87T3691, Category=Diodes, ComponentLink1Description=https://datasheet.ciiva.com/339/dm00035134-339433.pdf?src-supplier=Digi-Key, ComponentLink1URL=https://datasheet.ciiva.com/339/dm00035134-339433.pdf?src-supplier=Digi-Key, ComponentLink2Description=https://datasheet.ciiva.com/339/dm00035134-339434.pdf?src-supplier=Digi-Key, ComponentLink2URL=https://datasheet.ciiva.com/339/dm00035134-339434.pdf?src-supplier=Digi-Key, ComponentLink3Description=https://datasheet.ciiva.com/339/dm00035134-339435.pdf?src-supplier=Digi-Key, ComponentLink3URL=https://datasheet.ciiva.com/339/dm00035134-339435.pdf?src-supplier=Digi-Key, Diode Type=ZENER, Direction=Unidirectional, Lead Free="Lead Free", Manufacturer Part Number=SMC30J24A, Min Breakdown Voltage=26.7V, Mount="Surface Mount", Number of Pins=2, Number of Unidirectional Channels=1, Packaging="Tape and Reel", Peak Pulse Power=3kW, Polarity=Unidirectional, Pricing 1="2500=0,61100 (USD)", Radiation Hardening=No, REACH SVHC="No SVHC", RoHS=Yes, RoHS Compliant=Yes, Series="SMC30J, TRANSIL™", Supplier 1=Newark, Working Voltage=24V
L1 L2: "Shielded Power Inductors", ComponentLink1Description=Coilcraft, ComponentLink1URL=https://www.coilcraft.com/en-us/products/power/shielded-inductors/high-current-flat-wire/agp-ver/agm2222/?skuId=30439, ComponentLink2Description=Datasheet, ComponentLink2URL=https://www.coilcraft.com/getmedia/d4f4984d-2507-4e11-ae3d-89829a15fb28/agm2222.pdf
Power1: library part CMP-04776-000102-1, "CONN HEADER VERT 4POS 5.7MM", Current Rating=23A, Manufacturer=Molex, Temperature="-40°C to +120°C", Temperature Range High=+120°C, Temperature Range Low=-40°C, Voltage Rating=600V, Automotive=No, Category=Conn, ComponentLink2Description=Datasheet, ComponentLink2URL=https://www.molex.com/webdocs/datasheets/pdf/en-us/1720650004_PCB_HEADERS.pdf, Conn Gender=Male, Conn Orientation=Vertical, Contact Material=Gold,Nickel, Device Class L1=Connectors, Device Class L2="Headers and Wire Housings", Device Class L3=unset, Digikey Description="CONN HEADER VERT 4POS 5.7MM", Footprint Url=https://www.molex.com/pdm_docs/sd/1720650004_sd.pdf, Height=15.05mm, Lead Free=Yes, Manufacturer Part Number=1720650004, Mouser Description="Headers & Wire Housings Mega-Fit Vert Hdr Assy 4 ckt 15u Au", Number Of Contacts=4, Number Of Rows=2, Octopart=https://octopart.com/172065-0004-molex-34473112, Package=1720650004, Pitch=5.7mm, RoHS=TRUE
Q1: "IPN70R450P7S Series 700 V 10 A 7.1 W CoolMOS P7 Power Transistor - PG-SOT-223", Case/Package=SOT-223, Drain to Source Voltage (Vdss)=700V, Manufacturer=Infineon, Max Operating Temperature=150°C, Min Operating Temperature=-40°C, Category="Power Management ICs", ComponentLink1Description=https://www.infineon.com/dgdl/Infineon-IPN70R450P7S-DS-v02_00-EN.pdf?fileId=5546d4625f2e26bc015f526728366b78&src-supplier=Digi-Key, ComponentLink1URL=https://www.infineon.com/dgdl/Infineon-IPN70R450P7S-DS-v02_00-EN.pdf?fileId=5546d4625f2e26bc015f526728366b78&src-supplier=Digi-Key, Halogen Free="Halogen Free", Lead Free="Contains Lead", Manufacturer Part Number=IPN70R450P7SATMA1, Max Dual Supply Voltage=700V, Mount="Surface Mount", Pricing 1="1=1,00000, 10=0,89700, 100=0,69970, 500=0,57798, 1000=0,50700 (USD)", RoHS=Yes, RoHS Compliant=Yes, Stock 1=595, Supplier 1=Digi-Key
Q2: library part STD2NK100Z, "N-channel 1000 V, 6.25 Ohm typ., 1.85 A, Zener-protected SuperMESH Power MOSFET in DPAK package", Case/Package=DPAK, Continuous Drain Current (ID)=1.85A, Drain to Source Breakdown Voltage=1kV, Drain to Source Resistance=8.5R, Gate to Source Voltage (Vgs)=30V, Input Capacitance=499pF, Manufacturer=STMicroelectronics, Max Operating Temperature=150°C, Max Power Dissipation=70W, Min Operating Temperature=-55°C, Package Quantity=2500, Threshold Voltage=3.75V, Category=MOSFETs, ComponentLink1Description=https://datasheet.ciiva.com/8025/1561863-8025045.pdf?src-supplier=Element14, ComponentLink1URL=https://datasheet.ciiva.com/8025/1561863-8025045.pdf?src-supplier=Element14, ComponentLink2Description=https://datasheet.ciiva.com/25625/0900766b810e895b-25625259.pdf?src-supplier=RSComponents, ComponentLink2URL=https://datasheet.ciiva.com/25625/0900766b810e895b-25625259.pdf?src-supplier=RSComponents, ComponentLink3Description=https://datasheet.ciiva.com/938/cd00159991-938647.pdf?src-supplier=Digi-Key, ComponentLink3URL=https://datasheet.ciiva.com/938/cd00159991-938647.pdf?src-supplier=Digi-Key, ComponentLink4Description=https://datasheet.ciiva.com/6380/cd00159991-6380217.pdf?src-supplier=Digi-Key, ComponentLink4URL=https://datasheet.ciiva.com/6380/cd00159991-6380217.pdf?src-supplier=Digi-Key, ComponentLink5Description=https://datasheet.ciiva.com/16220/cd00159991-16220233.pdf?src-supplier=Future+Electronics, ComponentLink5URL=https://datasheet.ciiva.com/16220/cd00159991-16220233.pdf?src-supplier=Future+Electronics, ComponentLink6Description=https://datasheet.ciiva.com/6380/cd00159991-6380219.pdf?src-supplier=Digi-Key, ComponentLink6URL=https://datasheet.ciiva.com/6380/cd00159991-6380219.pdf?src-supplier=Digi-Key, Contact Plating=Tin,Matte, Drain to Source Voltage (Vdss)=1kV, Drain-source On Resistance-Max=8.5R, Element Configuration=Single, Height=2.4mm, Lead Free="Lead Free", Length=6.6mm, Manufacturer Part Number=STD2NK100Z, Mount="Surface Mount", Number of Elements=1, Number of Pins=3, On-State Resistance=8.5R, Packaging="Tape and Reel", Polarity=N-CHANNEL, Power Dissipation=70W, Pricing 1="1=2,45000, 10=2,19600, 100=1,76550, 500=1,45048, 1000=1,31862 (USD)", Radiation Hardening=No, Rds On Max=8.5R, REACH SVHC="No SVHC", RoHS=Yes, RoHS Compliant=Yes, Series=SuperMESH™, Stock 1=2365, Supplier 1=Digi-Key, Turn-Off Delay Time=41.5ns, Turn-On Delay Time=7.2ns, Width=6.2mm
Q4: "N-channel 1050 V, 1.4 Ohm typ., 4 A MDmesh K5 Power MOSFETs in TO-220FP package", Case/Package=TO-220-3, Continuous Drain Current (ID)=4A, Drain to Source Voltage (Vdss)=1.05kV, Input Capacitance=380pF, Manufacturer=STMicroelectronics, Max Operating Temperature=150°C, Max Power Dissipation=25W, Min Operating Temperature=-55°C, Category=MOSFETs, ComponentLink1Description=http://www.mouser.com/ds/2/389/stf7n105k5-955843.pdf?src-supplier=Mouser, ComponentLink1URL=http://www.mouser.com/ds/2/389/stf7n105k5-955843.pdf?src-supplier=Mouser, ComponentLink2Description=http://www.st.com/content/ccc/resource/technical/document/datasheet/26/20/d1/f7/b4/c1/4c/55/DM00112886.pdf/files/DM00112886.pdf/jcr:content/translations/en.DM00112886.pdf?src-supplier=Digi-Key, ComponentLink2URL=http://www.st.com/content/ccc/resource/technical/document/datasheet/26/20/d1/f7/b4/c1/4c/55/DM00112886.pdf/files/DM00112886.pdf/jcr:content/translations/en.DM00112886.pdf?src-supplier=Digi-Key, ComponentLink3Description=http://www.st.com/st-web-ui/static/active/en/resource/technical/document/datasheet/DM00112886.pdf?src-supplier=Avnet, ComponentLink3URL=http://www.st.com/st-web-ui/static/active/en/resource/technical/document/datasheet/DM00112886.pdf?src-supplier=Avnet, ComponentLink4Description=http://www.farnell.com/datasheets/2371890.pdf?src-supplier=Newark, ComponentLink4URL=http://www.farnell.com/datasheets/2371890.pdf?src-supplier=Newark, Lead Free="Lead Free", Manufacturer Part Number=STF7N105K5, Mount="Through Hole", Packaging=Rail/Tube, Pricing 1="1=3,16000, 10=2,71000, 100=2,16000, 500=1,87000, 1000=1,61000 (USD)", Rds On Max=2R, RoHS=Yes, RoHS Compliant=Yes, Stock 1=996, Supplier 1=Newark
R1 R2 R4 R5 R7 R8 R9 R10 R11 R12 R14 R16 R17 R18 R19 R20 R21 R22 R23 R24 R26 R27 R28 R29 R30 R32 R33 R34 R35 R36 R37 R38 R39 R41 R42 R43 R44 R45 R46 R47 R48 R49 R50: "Resistor with multiple footprints"
R3 R6 R13 R15 R25 R31 R40 R51 R52: library part "SMD Resistor", "Resistor with multiple footprints"
T1: "WE Transformer"
T2 T3: "High Voltage Transformer"
T4: "Pulse Transformer 1: 1 1500VDC 0.6Ohm Prim. DCR 0.6Ohm Sec. DCR 6 Terminal SMD Automotive", DC Resistance (DCR)=600mR, Manufacturer=Pulse, Max Operating Temperature=130°C, Min Operating Temperature=-40°C, Package Quantity=1500, Category=Transformers, ComponentLink1Description=https://datasheet.ciiva.com/29632/spm2007-61-29632613.pdf?src-supplier=Digi-Key, ComponentLink1URL=https://datasheet.ciiva.com/29632/spm2007-61-29632613.pdf?src-supplier=Digi-Key, ComponentLink2Description=https://datasheet.ciiva.com/29632/+spm2007-61-29632614.pdf?src-supplier=Digi-Key, ComponentLink2URL=https://datasheet.ciiva.com/29632/+spm2007-61-29632614.pdf?src-supplier=Digi-Key, ComponentLink3Description=https://datasheet.ciiva.com/2939/+spm2007-61-2939805.pdf?src-supplier=Digi-Key, ComponentLink3URL=https://datasheet.ciiva.com/2939/+spm2007-61-2939805.pdf?src-supplier=Digi-Key, Depth=8.64mm, Height=2.5mm, Length=6.73mm, Manufacturer Part Number=PE-68386NLT, Mount="Surface Mount", Number of Pins=6, Packaging="Tape and Reel", Pricing 1="1=2,70000, 10=2,16000, 25=1,75520, 50=1,71000, 100=1,66500, 250=1,62000, 500=1,60650 (USD)", Primary Impedance=600mR, Radiation Hardening=No, RoHS=Yes, RoHS Compliant=Yes, Secondary Impedance=600mR, Shielding=Unshielded, Stock 1=13846, Supplier 1=Digi-Key, Termination=SMD/SMT, Turns Ratio=1:1, Weight=0.009877oz, Width=6.7mm
T5: library part CMP-1048-00679-1, "General Purpose Transistor, NPN Silicon, 3-Pin SOT-23, Pb-Free, Tape and Reel", Manufacturer="On Semiconductor", ComponentLink1Description="Manufacturer URL", ComponentLink1URL=http://www.onsemi.com/, ComponentLink2Description=Datasheet, ComponentLink2URL=http://www.onsemi.cn/pub_link/Collateral/BC846ALT1-D.PDF, ComponentLink3Description="Package Specification", ComponentLink3URL=http://www.onsemi.cn/pub_link/Collateral/318-08.PDF, DatasheetVersion="Rev. 11", fT Min (MHz)=100, IC Continuous (A)=0.1, Mounting Technology="Surface Mount", PackageDescription="3-Pin Small Outline Transistor, Body 2.92 x 1.3 mm, Pitch 0.95 mm", PackageReference=SOT-23-3-318-08, PackageVersion="Rev. AP, 11/2009", Packing="Tape and Reel", PartNumber=BC848BLT1G, Polarity=NPN, RoHS=TRUE
U1: library part CMP-2000-07234-1, "Optocoupler, Phototransistor Output, VCEO 70 V, -55 to 100 degC, 4-Pin SOP (SOP4L), RoHS, Tape and Reel", Manufacturer=Vishay/Semiconductor, Maximum Collector Current=50mA, Maximum Collector Emitter Saturation Voltage=300mV, Maximum Collector Emitter Voltage=70V, Maximum Current Transfer Ratio @ Current=600%, Maximum Forward Voltage=1.6V, Maximum Input Current=60mA, Maximum Power Dissipation=250mW, Maximum Reverse Voltage=6V, Minimum Isolation Voltage=5000Vrms, Operating Temperature=-40to100°C, Package=4SOP, Package Description="4-Pin Small Outline Package Integrated Circuit, Body 4.1 x 7.5 mm, Pitch 2.54 mm", Package Reference=SOP4L, Typical Forward Voltage=1.25V, Category=TransistorandPhotovoltaicOutputPhotoCouplers, Datasheet URL=http://www.vishay.com/docs/83515/tclt1000.pdf, Datasheet Version="Rev. 2.9, 12/2015", Input Type=DC, Manufacturer URL=http://www.vishay.com/, Mounting Technology=SurfaceMount, Number of Channels per Chip=1, Output Type=DC, Packaging=Tape&Reel
U2: "Logic IC Output Optocoupler, 1-Element, 3750V Isolation", Case/Package=SOIC, Forward Current=4mA, Forward Voltage=1.55V, High Level Output Current=2A, Input Current=11mA, Isolation Voltage=3.75kV, Manufacturer="Broadcom Avago", Max Input Current=25mA, Max Operating Temperature=105°C, Max Output Current=2.5A, Max Power Dissipation=550mW, Min Operating Temperature=-40°C, Operating Supply Voltage=20V, Output Current=1A, Package Quantity=100, Approvals=CSA,UR,UL,IEC, Category=Optocouplers, Fall Time=8ns, Low Level Output Current=2A, Manufacturer Part Number=ACPL-P346-000E, Mount="Surface Mount", Number of Channels=1, Number of Pins=6, Output Voltage=20V, Packaging=Rail/Tube, Pricing 1="1=5,00000, 10=3,53300, 100=2,89340, 500=2,43922, 1000=2,38050 (USD)", Propagation Delay=120ns, Pulse Width Distortion (PWD)=50ns, Radiation Hardening=No, REACH SVHC="No SVHC", Rise Time=8ns, RoHS=Yes, RoHS Compliant=Yes, Stock 1=1063, Supplier 1=Digi-Key, Turn-On Delay Time=120ns
U3: "Current Mode PWM Controller 100kHz to 500kHz Automotive 31-Pin TSSOP EP Tube", Case/Package=TSSOP, Frequency=500kHz, Manufacturer="Analog Devices / Linear Technology", Max Operating Temperature=125°C, Max Supply Voltage=16V, Min Operating Temperature=-40°C, Min Supply Voltage=10.5V, Supplier Part Number 1=LT3752EFE-1#PBF-ND, Category="Voltage Regulators - Switching", Clock Sync=Yes, ComponentLink1Description=https://datasheet.ciiva.com/46429/1841069-46429096.pdf?src-supplier=Element14, ComponentLink1URL=https://datasheet.ciiva.com/46429/1841069-46429096.pdf?src-supplier=Element14, Manufacturer Part Number=LT3752EFE-1#PBF, Max Duty Cycle=95%, Number of Output Phases=1, Number of Outputs=1, Number of Pins=38, Packaging=Rail/Tube, Pricing 1="1=8,12000, 10=7,33800, 25=6,99720, 100=6,07550, 250=5,80244, 500=5,31300 (USD)", REACH SVHC="No SVHC", RoHS=Yes, RoHS Compliant=Yes, Stock 1=108, Supplier 1=Digi-Key, Switching Frequency=500kHz, Synchronous Rectifier=Yes, Topology="Forward Converter"
U4: "Optocoupler DC-IN 1-CH Transistor DC-OUT 4-Pin SSOP Embossed T/R", Case/Package=SOIC, Collector Emitter Voltage (VCEO)=300mV, Manufacturer=CEL, Output Current per Channel=30mA, Output Voltage=80V, Package Quantity=3500, Category=Optocouplers, Collector-emitter Voltage-Max=300mV, ComponentLink1Description=https://datasheet.ciiva.com/2088/ps2801c-1-ps2801c-4-2088034.pdf?src-supplier=Digi-Key, ComponentLink1URL=https://datasheet.ciiva.com/2088/ps2801c-1-ps2801c-4-2088034.pdf?src-supplier=Digi-Key, Input Type=DC, Lead Free="Lead Free", Manufacturer Part Number=PS2801C-1-V-F3-A, Mount="Surface Mount", Number of Channels=1, Packaging="Tape and Reel", RoHS=Yes, Series=NEPOC, Supplier 1=Digi-Key
U5: "LT8311 - Synchronous Rectifier Controller with Opto-Coupler Driver for Forward Converters", Case/Package=TSSOP, Manufacturer="Analog Devices / Linear Technology", Max Operating Temperature=150°C, Max Supply Voltage=30V, Min Operating Temperature=-40°C, Min Supply Voltage=3.7V, Operating Supply Current=4.5mA, Package Quantity=74, Category="Gate Drivers", ComponentLink1Description=https://datasheet.ciiva.com/46423/1810721-46423691.pdf?src-supplier=Element14, ComponentLink1URL=https://datasheet.ciiva.com/46423/1810721-46423691.pdf?src-supplier=Element14, ComponentLink2Description=https://datasheet.ciiva.com/29699/44625-29699311.pdf?src-supplier=Digi-Key, ComponentLink2URL=https://datasheet.ciiva.com/29699/44625-29699311.pdf?src-supplier=Digi-Key, Manufacturer Part Number=LT8311EFE#PBF, Mount="Surface Mount", Number of Pins=20, Packaging=Rail/Tube, Pricing 1="1=7,34000, 10=6,63200, 25=6,32360, 100=5,49060, 250=5,24384, 500=4,80150 (USD)", REACH SVHC="No SVHC", RoHS=Yes, RoHS Compliant=Yes, Supplier 1=Digi-Key
VOUT1: library part 150060GS75000, "WL-SMCW SMT Mono-color Chip LED Waterclear, size 0603, Green, 3.2V, 140deg", Emitting Color=Green, Forward Voltage typ.=3.2V, Operating Temperature="-40 to +85degC", Chip Technology=InGaN, ComponentLink1Description=Manufacturer, ComponentLink1URL=http://www.we-online.de, ComponentLink2Description=Datasheet, ComponentLink2URL=https://www.we-online.com/catalog/datasheet/150060GS75000.pdf, Dominant Wavelength typ.=525nm, Luminous Intensity typ.=430mcd, Mounting Technology=SMT, Packaging="Tape and Reel", Part Number=150060GS75000, Peak Wavelength typ.=515nm, Published Date="December 2019", Publisher="Wurth Elektronik", Size=0603, Viewing Angle=140deg
D2 D3 D10 D11: Supplier 1=Mouser

## Free pads (board coordinates)
  round 169.29 hole 169.29: 1(2144.76,250) 1(2145,3910) 1(5879.76,250) 1(6959.76,3910)

## Via types
v1: diameter 19.68, hole 7.87, Top Layer to Bottom Layer, 14 vias

## Nets (pads, with @x,y where several pads share a name; then routed paths per layer and width w, separated by ;. In a path a pad name is that pad's centre, name@x,y a point inside that pad or via, vN(x,y) a via of type N, cw(c..) or ccw(c..) an arc to the next point about the centre after c; other vN are vias at no path point)
12V: C19.1 C28.1 L2.2 T2.6
!PGOOD: R49.1 T5.1 U5.13
+24V_in: CTRL1.2 D3.1
+24V_out: C13.1 C14.1 C15.1 C38.2 D12.1 FAN1.1 L1.2 Power1.3 Power1.4 R47.1 R50.1
AOUT: D8.2 R17.1 U3.32
CG: U5.16
COMP: R28.1 U3.5
CSN: R14.2 U5.18
CSP: R12.2 U5.20
DCDC_EN: D2.2 D3.2 R2.2
FB_HV: R28.2 R29.1 U3.4
FG: U5.5
GND: C8.1 C13.2 C14.2 C15.2 C19.2 C28.2 C34.2 C35.2 C36.2 D12.2 FAN1.2 Power1.1 Power1.2 R13.1 R14.1 R42.2 R44.1 R45.2 R46.2 R51.1 R52.1 T1.7 T4.4 T5.2 U1.2 U3.38 U4.2 U5.1 U5.3 U5.21 VOUT1.1
  other v1: 5568.35,7568.27 5611.65,7568.27 5568.35,7611.57 5611.65,7611.57 5568.35,7654.88 5611.65,7654.88
HFB: C12.1 R10.2 R11.1 U3.1
HI_SENSE: C7.2 R5.1 U3.36
HOUT: Q2.1 U3.34
HV_GND_Switched: C5.2 D1.2 Q1.3 R1.1
HVIN+: F1.2 J1.1
HVIN+_FIL: C6.1 C9.2 C10.2 R4.1 R8.1 R31.1 R40.2 T1.1
HVIN+_Fused: C1.1 C2.1 C3.1 C16.1 F1.1 R3.2 R8.2 R15.2 T2.1 T3.1
INTVCC: C24.2 C32.2 D11.1 R9.2 R34.1 U3.26
INTVCC_unfil: C11.2 D6.1 R9.1 R10.1 R16.2
ISENSEN: C2.2 C3.2 C4.2 C7.1 C9.1 C10.1 C11.1 C12.2 C24.1 C30.2 C31.2 C32.1 C33.1 C36.1 J1.2 Q1.2 R6.2 R11.2 R20.1 R22.1 R25.2 R26.1 R27.2 R30.2 R32.2 R35.2 R36.2 R37.2 R38.2 R39.2 T1.5 T4.3 U3.18 U3.19 U3.20 U3.39
  other v1: 5308.35,6170.47 5351.65,6170.47 5308.35,6213.78 5351.65,6213.78 5308.35,6257.09 5351.65,6257.09 5308.35,6300.39 5351.65,6300.39
ISENSP: R24.1 U3.21
LV_ACCU_IN: CTRL1.1 D2.1
Net!PGOOD1_1: !PGOOD1.1 T5.3
Net!PGOOD1_2: !PGOOD1.2 R48.1
NetC1_2: C1.2 C4.1
NetC5_1: C5.1 D1.1 R3.1 U1.4
NetC6_2: C6.2 D4.2 R4.2
NetC8_2: C8.2 D5.1 R7.2
NetC16_2: C16.2 C17.2 C18.2 C20.2 C21.2 C22.2 Q4.2
NetC17_1: C17.1 C18.1 C20.1 C21.1 C22.1 R15.1
NetC23_1: C23.1 D7.1 U2.6
NetC25_1: C25.1 C26.1 D9.2 Q4.1 R18.2 R19.2
NetC25_2: C25.2 R18.1 U2.5
NetC27_2: C27.2 T4.1
NetC29_1: C29.1 R26.2
NetC29_2: C29.2 U3.2
NetC30_1: C30.1 U3.7
NetC31_1: C31.1 U3.17
NetC35_1: C35.1 U5.14
NetC37_1: C37.1 R45.1
NetC37_2: C37.2 U5.10
NetC38_1: C38.1 R46.1 R47.2 U5.11
NetD4_1: D4.1 Q2.2 T1.3
NetD5_2: D5.2 T1.8
NetD6_2: D6.2 T1.4
NetD7_2: D7.2 R16.1
NetD8_1: D8.1 R17.2 U2.1
NetD10_1: D10.1 R40.1
NetL1_1: L1.1 T2.8
NetL2_1: L2.1 T3.8
NetQ1_1: Q1.1 R1.2 U1.3
NetQ2_3: Q2.3 R5.2 R6.1
NetQ3_3: R12.1 R13.2 R51.2 R52.2
NetQ5_2: T3.6
NetQ6_1: R21.2
NetQ6_3: R23.2 R24.2 R25.1
NetR2_1: R2.1 U1.1
NetR20_2: R20.2 U2.3
NetR27_1: R27.1 R29.2 U4.3
NetR30_1: R30.1 U3.3
NetR31_2: R31.2 R33.1 U3.9
NetR32_1: R32.1 U3.8
NetR33_2: R33.2 R36.1 U3.10
NetR34_2: R34.2 U4.4
NetR35_1: R35.1 U3.11
NetR37_1: R37.1 U3.12
NetR38_1: R38.1 U3.13
NetR39_1: R39.1 U3.14
NetR41_2: R41.2 U5.9
NetR42_1: R42.1 U5.12
NetR43_1: R43.1 T4.6
NetR50_2: R50.2 VOUT1.2
OC: R22.2 R23.1 U3.22
Opto: R41.1 U4.1
OUT: R21.1 U3.24
SOUT: C27.1 U3.30
SWP: C23.2 C26.2 D9.1 Q4.3 R19.1 T2.5 T3.5 U2.4
SYNC: R43.2 R44.2 U5.15
V_AUX: C34.1 R7.1 R48.2 R49.2 U5.6 U5.7 U5.8
VIN_LT3: C33.2 D10.2 D11.2 U3.28